# Altium PCB PCB1.PcbDoc (part 2 of 2)
Units mil, origin at the board's own origin, x right, y up, seen from the top; angles counter-clockwise.
Board outline 6000 x 4000 mil, 2 copper layers (Top Layer, Bottom Layer); 87 components, 173 nets, 478 pads, 124 vias.
Unrouted connection lines stored in the file: 148.
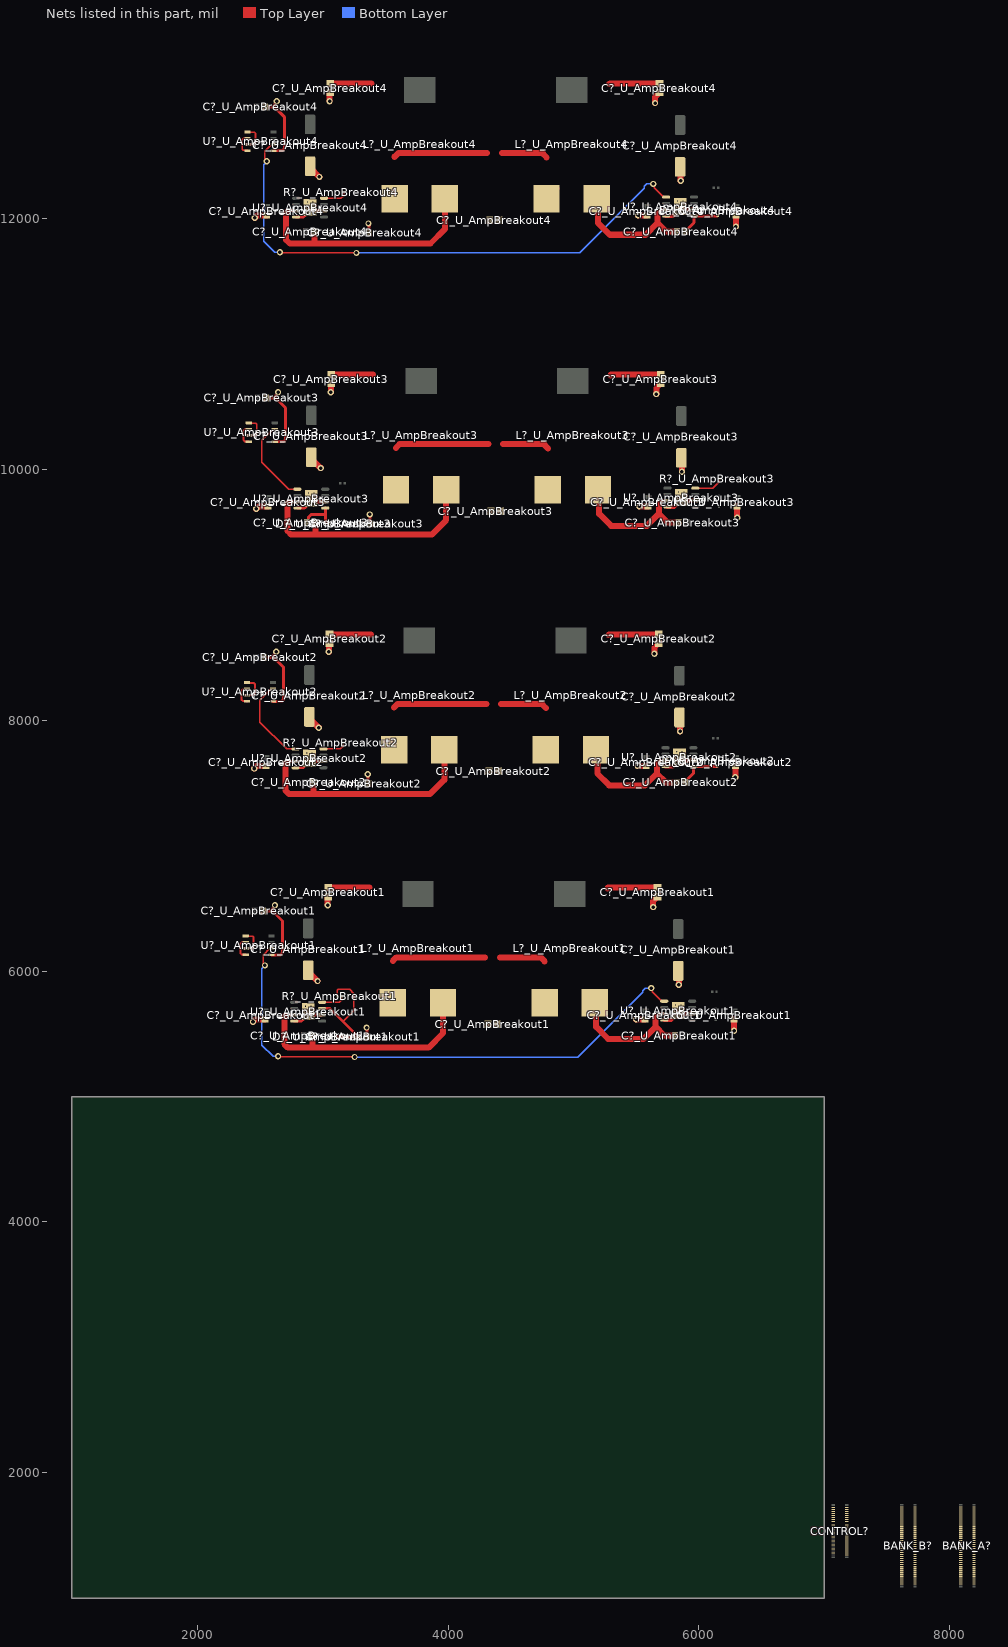
[diagram p2: the nets of this part, all layers, seen from the top]

## Via types
v1: diameter 50, hole 28, Top Layer to Bottom Layer, 76 vias
v2: diameter 19.68, hole 7.87, Top Layer to Bottom Layer, 48 vias

## Nets (pads, with @x,y where several pads share a name; then routed paths per layer and width w, separated by ;. In a path a pad name is that pad's centre, name@x,y a point inside that pad or via, vN(x,y) a via of type N, cw(c..) or ccw(c..) an arc to the next point about the centre after c; other vN are vias at no path point) (continued)
GND: BANK_A?.1 BANK_A?.2 BANK_A?.7 BANK_A?.8 BANK_A?.13 BANK_A?.14 BANK_A?.19 BANK_A?.20 BANK_A?.25 BANK_A?.26 BANK_A?.31 BANK_A?.37 BANK_A?.38 BANK_A?.43 BANK_A?.49 BANK_A?.50 BANK_A?.55 BANK_A?.56 BANK_A?.61 BANK_A?.62 BANK_A?.67 BANK_A?.68 BANK_A?.73 BANK_A?.74 BANK_A?.79 BANK_A?.80 BANK_B?.1 BANK_B?.2 BANK_B?.7 BANK_B?.8 BANK_B?.13 BANK_B?.14 BANK_B?.19 BANK_B?.20 BANK_B?.25 BANK_B?.31 BANK_B?.32 BANK_B?.37 BANK_B?.38 BANK_B?.43 BANK_B?.44 BANK_B?.49 BANK_B?.50 BANK_B?.55 BANK_B?.56 BANK_B?.61 BANK_B?.62 BANK_B?.67 BANK_B?.68 BANK_B?.73 BANK_B?.74 BANK_B?.79 C?_U_AmpBreakout1.1@3045,6594.07 C?_U_AmpBreakout1.2@2525,6480 C?_U_AmpBreakout1.2@2540,5613.07 C?_U_AmpBreakout1.2@2885,6006.14 C?_U_AmpBreakout1.2@3356.93,5475 C?_U_AmpBreakout1.2@5570,5613.07 C?_U_AmpBreakout1.2@5670,6594.07 C?_U_AmpBreakout1.2@5835,6001.14 C?_U_AmpBreakout1.2@6280,5613.07 C?_U_AmpBreakout2.1@3055,8614.07 C?_U_AmpBreakout2.2@2535,8500 C?_U_AmpBreakout2.2@2550,7633.07 C?_U_AmpBreakout2.2@2895,8026.14 C?_U_AmpBreakout2.2@3366.93,7495 C?_U_AmpBreakout2.2@5580,7633.07 C?_U_AmpBreakout2.2@5680,8614.07 C?_U_AmpBreakout2.2@5845,8021.14 C?_U_AmpBreakout2.2@6290,7633.07 C?_U_AmpBreakout3.1@3070,10684.07 C?_U_AmpBreakout3.2@2550,10570 C?_U_AmpBreakout3.2@2565,9703.07 C?_U_AmpBreakout3.2@2910,10096.14 C?_U_AmpBreakout3.2@3381.93,9565 C?_U_AmpBreakout3.2@5595,9703.07 C?_U_AmpBreakout3.2@5695,10684.07 C?_U_AmpBreakout3.2@5860,10091.14 C?_U_AmpBreakout3.2@6305,9703.07 C?_U_AmpBreakout4.1@3060,13004.07 C?_U_AmpBreakout4.2@2540,12890 C?_U_AmpBreakout4.2@2555,12023.07 C?_U_AmpBreakout4.2@2900,12416.14 C?_U_AmpBreakout4.2@3371.93,11885 C?_U_AmpBreakout4.2@5585,12023.07 C?_U_AmpBreakout4.2@5685,13004.07 C?_U_AmpBreakout4.2@5850,12411.14 C?_U_AmpBreakout4.2@6295,12023.07 CONTROL?.17 CONTROL?.18 CONTROL?.19 CONTROL?.20 CONTROL?.21 CONTROL?.22 CONTROL?.23 CONTROL?.24 CONTROL?.25 CONTROL?.27 U?_U_AmpBreakout1.4@2773.78,5601.54 U?_U_AmpBreakout1.4@5723.78,5610 U?_U_AmpBreakout1.5@2593.35,6130 U?_U_AmpBreakout1.6@2996.22,5651.54 U?_U_AmpBreakout1.6@5946.22,5660 U?_U_AmpBreakout1.9 U?_U_AmpBreakout2.4@2783.78,7621.54 U?_U_AmpBreakout2.4@5733.78,7630 U?_U_AmpBreakout2.5@2603.35,8150 U?_U_AmpBreakout2.6@3006.22,7671.54 U?_U_AmpBreakout2.6@5956.22,7680 U?_U_AmpBreakout2.9 U?_U_AmpBreakout3.4@2798.78,9691.54 U?_U_AmpBreakout3.4@5748.78,9700 U?_U_AmpBreakout3.5@2618.35,10220 U?_U_AmpBreakout3.6@3021.22,9741.54 U?_U_AmpBreakout3.6@5971.22,9750 U?_U_AmpBreakout3.9 U?_U_AmpBreakout4.4@2788.78,12011.54 U?_U_AmpBreakout4.4@5738.78,12020 U?_U_AmpBreakout4.5@2608.35,12540 U?_U_AmpBreakout4.6@3011.22,12061.54 U?_U_AmpBreakout4.6@5961.22,12070 U?_U_AmpBreakout4.9 | length 6976.1
  Top Layer w24: C?_U_AmpBreakout1.2@2525,6480 2600,6480 ; C?_U_AmpBreakout2.2@2535,8500 2610,8500 ; C?_U_AmpBreakout4.2@2540,12890 2615,12890 ; C?_U_AmpBreakout3.2@2550,10570 2625,10570 ; U?_U_AmpBreakout1.5@2593.35,6130 2665,6130 2680,6145 2680,6400 2600,6480 ; U?_U_AmpBreakout2.5@2603.35,8150 2675,8150 2690,8165 2690,8420 2610,8500 ; U?_U_AmpBreakout4.5@2608.35,12540 2680,12540 2695,12555 2695,12810 2615,12890 ; U?_U_AmpBreakout3.5@2618.35,10220 2690,10220 2705,10235 2705,10490 2625,10570 ; v1(2620,6525) 2620,6517.96 2600,6497.96 2600,6480 ; v1(2630,8545) 2630,8537.96 2610,8517.96 2610,8500 ; v1(2635,12935) 2635,12927.96 2615,12907.96 2615,12890 ; v1(2645,10615) 2645,10607.96 2625,10587.96 2625,10570 ; U?_U_AmpBreakout1.4@2773.78,5601.54 2831.65,5601.54 2846.61,5616.49 2846.61,5620.62 2859.21,5633.23 v2(2863.35,5633.23) ; U?_U_AmpBreakout2.4@2783.78,7621.54 2841.65,7621.54 2856.61,7636.49 2856.61,7640.62 2869.21,7653.23 v2(2873.35,7653.23) ; U?_U_AmpBreakout4.4@2788.78,12011.54 2846.65,12011.54 2861.61,12026.49 2861.61,12030.62 2874.21,12043.23 v2(2878.35,12043.23) ; U?_U_AmpBreakout3.4@2798.78,9691.54 2856.65,9691.54 2871.61,9706.49 2871.61,9710.62 2884.21,9723.23 v2(2888.35,9723.23) ; U?_U_AmpBreakout1.9@2906.65,5634.8 2923.39,5651.54 U?_U_AmpBreakout1.6@2996.22,5651.54 ; U?_U_AmpBreakout2.9@2916.65,7654.8 2933.39,7671.54 U?_U_AmpBreakout2.6@3006.22,7671.54 ; U?_U_AmpBreakout4.9@2921.65,12044.8 2938.39,12061.54 U?_U_AmpBreakout4.6@3011.22,12061.54 ; U?_U_AmpBreakout3.9@2931.65,9724.8 2948.39,9741.54 U?_U_AmpBreakout3.6@3021.22,9741.54 ; v1(3350,5550) 3353.46,5546.54 3353.46,5478.46 C?_U_AmpBreakout1.2@3356.93,5475 ; v1(3360,7570) 3363.46,7566.54 3363.46,7498.46 C?_U_AmpBreakout2.2@3366.93,7495 ; v1(3365,11960) 3368.46,11956.54 3368.46,11888.46 C?_U_AmpBreakout4.2@3371.93,11885 ; v1(3375,9640) 3378.46,9636.54 3378.46,9568.46 C?_U_AmpBreakout3.2@3381.93,9565
  Top Layer w32: U?_U_AmpBreakout1.4@5723.78,5610 5777.52,5610 5800.61,5633.09 5804.74,5633.09 v2(5813.35,5641.69) ; U?_U_AmpBreakout2.4@5733.78,7630 5787.52,7630 5810.61,7653.09 5814.74,7653.09 v2(5823.35,7661.69) ; U?_U_AmpBreakout4.4@5738.78,12020 5792.52,12020 5815.61,12043.09 5819.74,12043.09 v2(5828.35,12051.69) ; U?_U_AmpBreakout3.4@5748.78,9700 5802.52,9700 5825.61,9723.09 5829.74,9723.09 v2(5838.35,9731.69) ; v2(5856.65,5685) 5856.65,5672.74 5869.39,5660 U?_U_AmpBreakout1.6@5946.22,5660 ; v2(5866.65,7705) 5866.65,7692.74 5879.39,7680 U?_U_AmpBreakout2.6@5956.22,7680 ; v2(5871.65,12095) 5871.65,12082.74 5884.39,12070 U?_U_AmpBreakout4.6@5961.22,12070 ; v2(5881.65,9775) 5881.65,9762.74 5894.39,9750 U?_U_AmpBreakout3.6@5971.22,9750
  Top Layer w48: v1(2445,5595) 2463.07,5613.07 C?_U_AmpBreakout1.2@2540,5613.07 ; v1(2455,7615) 2473.07,7633.07 C?_U_AmpBreakout2.2@2550,7633.07 ; v1(2460,12005) 2478.07,12023.07 C?_U_AmpBreakout4.2@2555,12023.07 ; v1(2470,9685) 2488.07,9703.07 C?_U_AmpBreakout3.2@2565,9703.07 ; C?_U_AmpBreakout1.2@2885,6006.14 2885,5995 2960,5920 v1(2960,5920.51) v1@2957.99,5922.53 ; C?_U_AmpBreakout2.2@2895,8026.14 2895,8015 2970,7940 v1(2970,7940.51) v1@2967.99,7942.53 ; C?_U_AmpBreakout4.2@2900,12416.14 2900,12405 2975,12330 v1(2975,12330.51) v1@2972.99,12332.53 ; C?_U_AmpBreakout3.2@2910,10096.14 2910,10085 2985,10010 v1(2985,10010.51) v1@2982.99,10012.53 ; v1(3040,6525) 3040.38,6525.38 3040.38,6589.45 C?_U_AmpBreakout1.1@3045,6594.07 ; v1(3050,8545) 3050.38,8545.38 3050.38,8609.45 C?_U_AmpBreakout2.1@3055,8614.07 ; v1(3055,12935) 3055.38,12935.38 3055.38,12999.45 C?_U_AmpBreakout4.1@3060,13004.07 ; v1(3065,10615) 3065.38,10615.38 3065.38,10679.45 C?_U_AmpBreakout3.1@3070,10684.07 ; v1(5500,5615) 5500.54,5615 5502.09,5613.45 5569.62,5613.45 C?_U_AmpBreakout1.2@5570,5613.07 ; v1(5510,7635) 5510.54,7635 5512.09,7633.45 5579.62,7633.45 C?_U_AmpBreakout2.2@5580,7633.07 ; v1(5515,12025) 5515.54,12025 5517.09,12023.45 5584.62,12023.45 C?_U_AmpBreakout4.2@5585,12023.07 ; v1(5525,9705) 5525.54,9705 5527.09,9703.45 5594.62,9703.45 C?_U_AmpBreakout3.2@5595,9703.07 ; v1(5635,6510) 5635.38,6510.38 5635.38,6559.45 5663.37,6587.44 5663.37,6588.45 5668.98,6594.07 C?_U_AmpBreakout1.2@5670,6594.07 ; v1(5645,8530) 5645.38,8530.38 5645.38,8579.45 5673.37,8607.44 5673.37,8608.45 5678.98,8614.07 C?_U_AmpBreakout2.2@5680,8614.07 ; v1(5650,12920) 5650.38,12920.38 5650.38,12969.45 5678.37,12997.44 5678.37,12998.45 5683.98,13004.07 C?_U_AmpBreakout4.2@5685,13004.07 ; v1(5660,10600) 5660.38,10600.38 5660.38,10649.45 5688.37,10677.44 5688.37,10678.45 5693.98,10684.07 C?_U_AmpBreakout3.2@5695,10684.07 ; C?_U_AmpBreakout1.2@5835,6001.14 5839.62,5996.52 5839.62,5890.38 v1(5840,5890) ; C?_U_AmpBreakout2.2@5845,8021.14 5849.62,8016.52 5849.62,7910.38 v1(5850,7910) ; C?_U_AmpBreakout4.2@5850,12411.14 5854.62,12406.52 5854.62,12300.38 v1(5855,12300) ; C?_U_AmpBreakout3.2@5860,10091.14 5864.62,10086.52 5864.62,9980.38 v1(5865,9980) ; v1(6280,5525) C?_U_AmpBreakout1.2@6280,5613.07 ; v1(6290,7545) C?_U_AmpBreakout2.2@6290,7633.07 ; v1(6295,11935) C?_U_AmpBreakout4.2@6295,12023.07 ; v1(6305,9615) C?_U_AmpBreakout3.2@6305,9703.07
  other v2: 2906.65,5633.23 5856.65,5641.69 2863.35,5676.54 2906.65,5676.54 5813.35,5685 2863.35,5719.84 2906.65,5719.84 5813.35,5728.31 5856.65,5728.31 2916.65,7653.23 5866.65,7661.69 2873.35,7696.54 2916.65,7696.54 5823.35,7705 2873.35,7739.84 2916.65,7739.84 5823.35,7748.31 5866.65,7748.31 2931.65,9723.23 5881.65,9731.69 2888.35,9766.54 2931.65,9766.54 5838.35,9775 2888.35,9809.84 2931.65,9809.84 5838.35,9818.31 5881.65,9818.31 2921.65,12043.23 5871.65,12051.69 2878.35,12086.54 2921.65,12086.54 5828.35,12095 2878.35,12129.84 2921.65,12129.84 5828.35,12138.31 5871.65,12138.31
IN_U_AmpBreakout1_N: U?_U_AmpBreakout1.2@2386.65,6230 U?_U_AmpBreakout1.4@2386.65,6130 | length 169.6
  Top Layer w15: U?_U_AmpBreakout1.4@2386.65,6130 2383.41,6133.24 2353.79,6133.24 2344.55,6142.48 2344.55,6217.52 2353.79,6226.76 2383.41,6226.76 U?_U_AmpBreakout1.2@2386.65,6230
IN_U_AmpBreakout1_P: U?_U_AmpBreakout1.1@2386.65,6280 U?_U_AmpBreakout1.3@2386.65,6180 | length 214.1
  Top Layer w15: U?_U_AmpBreakout1.3@2386.65,6180 2440,6180 2450,6190 2450,6205 2450,6215 2450,6268.42 2441.21,6277.21 2389.45,6277.21 U?_U_AmpBreakout1.1@2386.65,6280
IN_U_AmpBreakout2_N: U?_U_AmpBreakout2.2@2396.65,8250 U?_U_AmpBreakout2.4@2396.65,8150 | length 169.6
  Top Layer w15: U?_U_AmpBreakout2.4@2396.65,8150 2393.41,8153.24 2363.79,8153.24 2354.55,8162.48 2354.55,8237.52 2363.79,8246.76 2393.41,8246.76 U?_U_AmpBreakout2.2@2396.65,8250
IN_U_AmpBreakout2_P: U?_U_AmpBreakout2.1@2396.65,8300 U?_U_AmpBreakout2.3@2396.65,8200 | length 214.1
  Top Layer w15: U?_U_AmpBreakout2.3@2396.65,8200 2450,8200 2460,8210 2460,8225 2460,8235 2460,8288.42 2451.21,8297.21 2399.45,8297.21 U?_U_AmpBreakout2.1@2396.65,8300
IN_U_AmpBreakout3_N: U?_U_AmpBreakout3.2@2411.65,10320 U?_U_AmpBreakout3.4@2411.65,10220 | length 169.6
  Top Layer w15: U?_U_AmpBreakout3.4@2411.65,10220 2408.41,10223.24 2378.79,10223.24 2369.55,10232.48 2369.55,10307.52 2378.79,10316.76 2408.41,10316.76 U?_U_AmpBreakout3.2@2411.65,10320
IN_U_AmpBreakout3_P: U?_U_AmpBreakout3.1@2411.65,10370 U?_U_AmpBreakout3.3@2411.65,10270 | length 214.1
  Top Layer w15: U?_U_AmpBreakout3.3@2411.65,10270 2465,10270 2475,10280 2475,10295 2475,10305 2475,10358.42 2466.21,10367.21 2414.45,10367.21 U?_U_AmpBreakout3.1@2411.65,10370
IN_U_AmpBreakout4_N: U?_U_AmpBreakout4.2@2401.65,12640 U?_U_AmpBreakout4.4@2401.65,12540 | length 169.6
  Top Layer w15: U?_U_AmpBreakout4.4@2401.65,12540 2398.41,12543.24 2368.79,12543.24 2359.55,12552.48 2359.55,12627.52 2368.79,12636.76 2398.41,12636.76 U?_U_AmpBreakout4.2@2401.65,12640
IN_U_AmpBreakout4_P: U?_U_AmpBreakout4.1@2401.65,12690 U?_U_AmpBreakout4.3@2401.65,12590 | length 214.1
  Top Layer w15: U?_U_AmpBreakout4.3@2401.65,12590 2455,12590 2465,12600 2465,12615 2465,12625 2465,12678.42 2456.21,12687.21 2404.45,12687.21 U?_U_AmpBreakout4.1@2401.65,12690
Net*?_2C: CONTROL?.2 CONTROL?.4 CONTROL?.6 CONTROL?.8 CONTROL?.10 CONTROL?.12 CONTROL?.14 CONTROL?.16
Net*?_3A: BANK_A?.3
Net*?_3B: BANK_B?.3
Net*?_4A: BANK_A?.4
Net*?_4B: BANK_B?.4
Net*?_5A: BANK_A?.5
Net*?_5B: BANK_B?.5
Net*?_6A: BANK_A?.6
Net*?_6B: BANK_B?.6
Net*?_9A: BANK_A?.9
Net*?_9B: BANK_B?.9
Net*?_10A: BANK_A?.10
Net*?_10B: BANK_B?.10
Net*?_11A: BANK_A?.11
Net*?_11B: BANK_B?.11
Net*?_12A: BANK_A?.12
Net*?_12B: BANK_B?.12
Net*?_15A: BANK_A?.15
Net*?_15B: BANK_B?.15
Net*?_16A: BANK_A?.16
Net*?_16B: BANK_B?.16
Net*?_17A: BANK_A?.17
Net*?_17B: BANK_B?.17
Net*?_18A: BANK_A?.18
Net*?_18B: BANK_B?.18
Net*?_21A: BANK_A?.21
Net*?_21B: BANK_B?.21
Net*?_22A: BANK_A?.22
Net*?_22B: BANK_B?.22
Net*?_23A: BANK_A?.23
Net*?_23B: BANK_B?.23
Net*?_24A: BANK_A?.24
Net*?_24B: BANK_B?.24
Net*?_26B: BANK_B?.26
Net*?_26C: CONTROL?.26
Net*?_27A: BANK_A?.27
Net*?_27B: BANK_B?.27
Net*?_28A: BANK_A?.28
Net*?_28B: BANK_B?.28
Net*?_28C: CONTROL?.28
Net*?_29A: BANK_A?.29
Net*?_29B: BANK_B?.29
Net*?_29C: CONTROL?.29
Net*?_30A: BANK_A?.30
Net*?_30B: BANK_B?.30
Net*?_30C: CONTROL?.30
Net*?_31C: CONTROL?.31
Net*?_32A: BANK_A?.32
Net*?_32C: CONTROL?.32
Net*?_33A: BANK_A?.33
Net*?_33B: BANK_B?.33
Net*?_33C: CONTROL?.33
Net*?_34A: BANK_A?.34
Net*?_34B: BANK_B?.34
Net*?_34C: CONTROL?.34
Net*?_35A: BANK_A?.35
Net*?_35B: BANK_B?.35
Net*?_35C: CONTROL?.35
Net*?_36A: BANK_A?.36
Net*?_36B: BANK_B?.36
Net*?_36C: CONTROL?.36
Net*?_37C: CONTROL?.37
Net*?_38C: CONTROL?.38
Net*?_39A: BANK_A?.39
Net*?_39B: BANK_B?.39
Net*?_39C: CONTROL?.39
Net*?_40A: BANK_A?.40
Net*?_40B: BANK_B?.40
Net*?_40C: CONTROL?.40
Net*?_41A: BANK_A?.41
Net*?_41B: BANK_B?.41
Net*?_41C: CONTROL?.41
Net*?_42A: BANK_A?.42
Net*?_42B: BANK_B?.42
Net*?_42C: CONTROL?.42
Net*?_43C: CONTROL?.43
Net*?_44A: BANK_A?.44
Net*?_44C: CONTROL?.44
Net*?_45A: BANK_A?.45
Net*?_45B: BANK_B?.45
Net*?_45C: CONTROL?.45
Net*?_46A: BANK_A?.46
Net*?_46B: BANK_B?.46
Net*?_46C: CONTROL?.46
Net*?_47A: BANK_A?.47
Net*?_47B: BANK_B?.47
Net*?_47C: CONTROL?.47
Net*?_48A: BANK_A?.48
Net*?_48B: BANK_B?.48
Net*?_48C: CONTROL?.48
Net*?_49C: CONTROL?.49
Net*?_50C: CONTROL?.50
Net*?_51A: BANK_A?.51
Net*?_51B: BANK_B?.51
Net*?_52A: BANK_A?.52
Net*?_52B: BANK_B?.52
Net*?_53A: BANK_A?.53
Net*?_53B: BANK_B?.53
Net*?_54A: BANK_A?.54
Net*?_54B: BANK_B?.54
Net*?_57A: BANK_A?.57
Net*?_57B: BANK_B?.57
Net*?_58A: BANK_A?.58
Net*?_58B: BANK_B?.58
Net*?_59A: BANK_A?.59
Net*?_59B: BANK_B?.59
Net*?_60A: BANK_A?.60
Net*?_60B: BANK_B?.60
Net*?_63A: BANK_A?.63
Net*?_63B: BANK_B?.63
Net*?_64A: BANK_A?.64
Net*?_64B: BANK_B?.64
Net*?_65A: BANK_A?.65
Net*?_65B: BANK_B?.65
Net*?_66A: BANK_A?.66
Net*?_66B: BANK_B?.66
Net*?_69A: BANK_A?.69
Net*?_69B: BANK_B?.69
Net*?_70A: BANK_A?.70
Net*?_70B: BANK_B?.70
Net*?_71A: BANK_A?.71
Net*?_71B: BANK_B?.71
Net*?_72A: BANK_A?.72
Net*?_72B: BANK_B?.72
Net*?_75A: BANK_A?.75
Net*?_75B: BANK_B?.75
Net*?_76A: BANK_A?.76
Net*?_76B: BANK_B?.76
Net*?_77A: BANK_A?.77
Net*?_77B: BANK_B?.77
Net*?_78A: BANK_A?.78
Net*?_78B: BANK_B?.78
Net*?_80B: BANK_B?.80
NetC?_U_AmpBreakout1_1: C?_U_AmpBreakout1.1@3290,5475 D?_U_AmpBreakout1.1@3106.54,5475 R?_U_AmpBreakout1.1@3117.28,5800 U?_U_AmpBreakout1.7@2996.22,5701.54 | length 1028.9
  Top Layer w10: R?_U_AmpBreakout1.1@3117.28,5800 3117.28,5847.28 3125,5855 3215,5855 3250,5820 3250,5684.1 3165.45,5599.55 ; C?_U_AmpBreakout1.1@3286.06,5475 C?_U_AmpBreakout1.1@3290,5475
  Top Layer w24: U?_U_AmpBreakout1.7@2996.22,5701.54 3059.53,5701.54 3270.5,5490.56 3278.38,5490.56 3286.06,5482.87 C?_U_AmpBreakout1.1@3286.06,5475 ; D?_U_AmpBreakout1.1@3106.54,5475 C?_U_AmpBreakout1.1@3290,5475
NetC?_U_AmpBreakout2_1: C?_U_AmpBreakout2.1@5888.46,7505 D?_U_AmpBreakout2.2@6145,7633.46 U?_U_AmpBreakout2.5@5956.22,7630 | length 345.7
  Top Layer w10: C?_U_AmpBreakout2.1@5888.46,7505 C?_U_AmpBreakout2.1@5888.46,7508.94 ; D?_U_AmpBreakout2.2@6143.27,7631.73 D?_U_AmpBreakout2.2@6145,7633.46
  Top Layer w24: C?_U_AmpBreakout2.1@5888.46,7508.94 5956.22,7576.69 U?_U_AmpBreakout2.5@5956.22,7630 6141.54,7630 D?_U_AmpBreakout2.2@6145,7633.46
NetC?_U_AmpBreakout3_1: C?_U_AmpBreakout3.1@2876.54,9575 D?_U_AmpBreakout3.2@3048.46,9565 U?_U_AmpBreakout3.5@3021.22,9691.54 | length 330.6
  Top Layer w10: D?_U_AmpBreakout3.2@3045.71,9565 D?_U_AmpBreakout3.2@3048.46,9565
  Top Layer w24: C?_U_AmpBreakout3.1@2876.54,9575 2887.1,9585.56 2887.1,9618.53 2909.08,9640.51 3021.22,9640.51 ; U?_U_AmpBreakout3.5@3021.22,9691.54 3021.22,9640.51 ; D?_U_AmpBreakout3.2@3045.71,9565 3021.22,9589.49 3021.22,9640.51
NetC?_U_AmpBreakout4_1: C?_U_AmpBreakout4.1@5893.46,11895 D?_U_AmpBreakout4.2@6150,12023.46 U?_U_AmpBreakout4.5@5961.22,12020 | length 345.7
  Top Layer w10: C?_U_AmpBreakout4.1@5893.46,11895 C?_U_AmpBreakout4.1@5893.46,11898.94 ; D?_U_AmpBreakout4.2@6148.27,12021.73 D?_U_AmpBreakout4.2@6150,12023.46
  Top Layer w24: C?_U_AmpBreakout4.1@5893.46,11898.94 5961.22,11966.69 U?_U_AmpBreakout4.5@5961.22,12020 6146.54,12020 D?_U_AmpBreakout4.2@6150,12023.46
NetR?_U_AmpBreakout1_2: R?_U_AmpBreakout1.2@3152.72,5800 U?_U_AmpBreakout1.8@2996.22,5751.54 | length 192.6
  Top Layer w10: U?_U_AmpBreakout1.8@2996.22,5751.54 3131.54,5751.54 3152.72,5772.72 R?_U_AmpBreakout1.2@3152.72,5800
NetR?_U_AmpBreakout2_2: R?_U_AmpBreakout2.2@3162.72,7820 U?_U_AmpBreakout2.8@3006.22,7771.54 | length 192.6
  Top Layer w10: U?_U_AmpBreakout2.8@3006.22,7771.54 3141.54,7771.54 3162.72,7792.72 R?_U_AmpBreakout2.2@3162.72,7820
NetR?_U_AmpBreakout3_2: R?_U_AmpBreakout3.2@6165,9925 U?_U_AmpBreakout3.8@5971.22,9850 | length 236.6
  Top Layer w10: U?_U_AmpBreakout3.8@5971.22,9850 6110,9850 6160.16,9900.16 6160.16,9920.16 R?_U_AmpBreakout3.2@6165,9925
NetR?_U_AmpBreakout4_2: R?_U_AmpBreakout4.2@3167.72,12210 U?_U_AmpBreakout4.8@3011.22,12161.54 | length 192.6
  Top Layer w10: U?_U_AmpBreakout4.8@3011.22,12161.54 3146.54,12161.54 3167.72,12182.72 R?_U_AmpBreakout4.2@3167.72,12210
NetU?_U_AmpBreakout1_1: U?_U_AmpBreakout1.1@5723.78,5760 U?_U_AmpBreakout1.6@2593.35,6180 | length 4368.3
  Top Layer w10: v1(2540,6045) 2530.86,6045 2525,6050.86 2525,6125.43 2579.57,6180 U?_U_AmpBreakout1.6@2593.35,6180 ; v1(2645,5320) 2647.5,5317.5 3252.5,5317.5 v1(3255,5315) ; v1(5620,5865) 5627.65,5857.35 5627.65,5836.44 5704.1,5760 U?_U_AmpBreakout1.1@5723.78,5760
  Bottom Layer w10: v1(2540,6045) 2515,6020 2515,5410 2605,5320 v1(2645,5320) ; v1(3255,5315) 5035,5315 5550.86,5830.86 5550.86,5845.03 5570.82,5865 v1(5620,5865)
NetU?_U_AmpBreakout2_1: U?_U_AmpBreakout2.1@2783.78,7771.54 U?_U_AmpBreakout2.7@2603.35,8250 | length 688.1
  Top Layer w10: U?_U_AmpBreakout2.7@2603.35,8250 2589.57,8250 2500,8160.43 2500,7985 2713.46,7771.54 U?_U_AmpBreakout2.1@2783.78,7771.54
NetU?_U_AmpBreakout3_1: U?_U_AmpBreakout3.1@2798.78,9841.54 U?_U_AmpBreakout3.7@2618.35,10320 | length 688.1
  Top Layer w10: U?_U_AmpBreakout3.7@2618.35,10320 2604.57,10320 2515,10230.43 2515,10055 2728.46,9841.54 U?_U_AmpBreakout3.1@2798.78,9841.54
NetU?_U_AmpBreakout4_1: U?_U_AmpBreakout4.1@5738.78,12170 U?_U_AmpBreakout4.6@2608.35,12590 | length 4368.3
  Top Layer w10: v1(2555,12455) 2545.86,12455 2540,12460.86 2540,12535.43 2594.57,12590 U?_U_AmpBreakout4.6@2608.35,12590 ; v1(2660,11730) 2662.5,11727.5 3267.5,11727.5 v1(3270,11725) ; v1(5635,12275) 5642.65,12267.35 5642.65,12246.44 5719.1,12170 U?_U_AmpBreakout4.1@5738.78,12170
  Bottom Layer w10: v1(2555,12455) 2530,12430 2530,11820 2620,11730 v1(2660,11730) ; v1(3270,11725) 5050,11725 5565.86,12240.86 5565.86,12255.03 5585.82,12275 v1(5635,12275)
OUT_U_AmpBreakout1_N: C?_U_AmpBreakout1.1@4392.4,5575 C?_U_AmpBreakout1.1@5670,6665 L?_U_AmpBreakout1.1@4770.2,5745.88 | length 884.3
  Top Layer w48: 4414.16,6110 4742.08,6110 ; 4742.08,6105 4770.2,6076.88 ; L?_U_AmpBreakout1.1@4770.2,5745.88 L?_U_AmpBreakout1.1@4851.2,5826.88 ; 5270,6660 5275,6665 C?_U_AmpBreakout1.1@5670,6665
OUT_U_AmpBreakout1_P: C?_U_AmpBreakout1.2@3045,6665 C?_U_AmpBreakout1.2@4317.6,5575 L?_U_AmpBreakout1.1@3560.2,5745.88 | length 1077.8
  Top Layer w48: C?_U_AmpBreakout1.2@3045,6665 3375,6665 ; L?_U_AmpBreakout1.1@3560,5746.08 L?_U_AmpBreakout1.1@3560.2,5745.88 ; 3560,6081.88 3588.12,6110 4295.84,6110
OUT_U_AmpBreakout2_N: C?_U_AmpBreakout2.1@4402.4,7595 C?_U_AmpBreakout2.1@5680,8685 L?_U_AmpBreakout2.1@4780.2,7765.88 | length 884.3
  Top Layer w48: 4424.16,8130 4752.08,8130 ; 4752.08,8125 4780.2,8096.88 ; L?_U_AmpBreakout2.1@4780.2,7765.88 L?_U_AmpBreakout2.1@4861.2,7846.88 ; 5280,8680 5285,8685 C?_U_AmpBreakout2.1@5680,8685
OUT_U_AmpBreakout2_P: C?_U_AmpBreakout2.2@3055,8685 C?_U_AmpBreakout2.2@4327.6,7595 L?_U_AmpBreakout2.1@3570.2,7765.88 | length 1077.8
  Top Layer w48: C?_U_AmpBreakout2.2@3055,8685 3385,8685 ; L?_U_AmpBreakout2.1@3570,7766.08 L?_U_AmpBreakout2.1@3570.2,7765.88 ; 3570,8101.88 3598.12,8130 4305.84,8130
OUT_U_AmpBreakout3_N: C?_U_AmpBreakout3.1@4417.4,9665 C?_U_AmpBreakout3.1@5695,10755 L?_U_AmpBreakout3.1@4795.2,9835.88 | length 884.3
  Top Layer w48: 4439.16,10200 4767.08,10200 ; 4767.08,10195 4795.2,10166.88 ; L?_U_AmpBreakout3.1@4795.2,9835.88 L?_U_AmpBreakout3.1@4876.2,9916.88 ; 5295,10750 5300,10755 C?_U_AmpBreakout3.1@5695,10755
OUT_U_AmpBreakout3_P: C?_U_AmpBreakout3.2@3070,10755 C?_U_AmpBreakout3.2@4342.6,9665 L?_U_AmpBreakout3.1@3585.2,9835.88 | length 1077.8
  Top Layer w48: C?_U_AmpBreakout3.2@3070,10755 3400,10755 ; L?_U_AmpBreakout3.1@3585,9836.08 L?_U_AmpBreakout3.1@3585.2,9835.88 ; 3585,10171.88 3613.12,10200 4320.84,10200
OUT_U_AmpBreakout4_N: C?_U_AmpBreakout4.1@4407.4,11985 C?_U_AmpBreakout4.1@5685,13075 L?_U_AmpBreakout4.1@4785.2,12155.88 | length 884.3
  Top Layer w48: 4429.16,12520 4757.08,12520 ; 4757.08,12515 4785.2,12486.88 ; L?_U_AmpBreakout4.1@4785.2,12155.88 L?_U_AmpBreakout4.1@4866.2,12236.88 ; 5285,13070 5290,13075 C?_U_AmpBreakout4.1@5685,13075
OUT_U_AmpBreakout4_P: C?_U_AmpBreakout4.2@3060,13075 C?_U_AmpBreakout4.2@4332.6,11985 L?_U_AmpBreakout4.1@3575.2,12155.88 | length 1077.8
  Top Layer w48: C?_U_AmpBreakout4.2@3060,13075 3390,13075 ; L?_U_AmpBreakout4.1@3575,12156.08 L?_U_AmpBreakout4.1@3575.2,12155.88 ; 3575,12491.88 3603.12,12520 4310.84,12520
PRE_OUT_U_AmpBreakout1_N: C?_U_AmpBreakout1.2@5811.54,5485 L?_U_AmpBreakout1.2@5169.8,5745.88 U?_U_AmpBreakout1.3@5723.78,5660 | length 1093.5
  Top Layer w24: 5655,5635 5680,5660 U?_U_AmpBreakout1.3@5723.78,5660
  Top Layer w48: L?_U_AmpBreakout1.2@5169.8,5745.88 5180,5735.69 5180,5555 5275,5460 5560,5460 5655,5555 ; 5655,5635 5655,5555 ; C?_U_AmpBreakout1.2@5811.54,5485 5725,5485 5655,5555
PRE_OUT_U_AmpBreakout1_P: C?_U_AmpBreakout1.2@2918.46,5485 L?_U_AmpBreakout1.2@3959.8,5745.88 U?_U_AmpBreakout1.3@2773.78,5651.54 | length 1962.6
  Top Layer w24: 2705,5645 2711.54,5651.54 U?_U_AmpBreakout1.3@2773.78,5651.54
  Top Layer w48: 2705,5645 2695,5635 2695,5418.12 2723.12,5390 2918.46,5390 ; C?_U_AmpBreakout1.2@2918.46,5485 2918.46,5390 ; L?_U_AmpBreakout1.2@3959.8,5745.88 3959.8,5504.8 3845,5390 2918.46,5390
PRE_OUT_U_AmpBreakout2_N: C?_U_AmpBreakout2.2@5821.54,7505 L?_U_AmpBreakout2.2@5179.8,7765.88 U?_U_AmpBreakout2.3@5733.78,7680 | length 1093.5
  Top Layer w24: 5665,7655 5690,7680 U?_U_AmpBreakout2.3@5733.78,7680
  Top Layer w48: L?_U_AmpBreakout2.2@5179.8,7765.88 5190,7755.69 5190,7575 5285,7480 5570,7480 5665,7575 ; 5665,7655 5665,7575 ; C?_U_AmpBreakout2.2@5821.54,7505 5735,7505 5665,7575
PRE_OUT_U_AmpBreakout2_P: C?_U_AmpBreakout2.2@2928.46,7505 L?_U_AmpBreakout2.2@3969.8,7765.88 U?_U_AmpBreakout2.3@2783.78,7671.54 | length 1962.6
  Top Layer w24: 2715,7665 2721.54,7671.54 U?_U_AmpBreakout2.3@2783.78,7671.54
  Top Layer w48: 2715,7665 2705,7655 2705,7438.12 2733.12,7410 2928.46,7410 ; C?_U_AmpBreakout2.2@2928.46,7505 2928.46,7410 ; L?_U_AmpBreakout2.2@3969.8,7765.88 3969.8,7524.8 3855,7410 2928.46,7410
PRE_OUT_U_AmpBreakout3_N: C?_U_AmpBreakout3.2@5836.54,9575 L?_U_AmpBreakout3.2@5194.8,9835.88 U?_U_AmpBreakout3.3@5748.78,9750 | length 1093.5
  Top Layer w24: 5680,9725 5705,9750 U?_U_AmpBreakout3.3@5748.78,9750
  Top Layer w48: L?_U_AmpBreakout3.2@5194.8,9835.88 5205,9825.69 5205,9645 5300,9550 5585,9550 5680,9645 ; 5680,9725 5680,9645 ; C?_U_AmpBreakout3.2@5836.54,9575 5750,9575 5680,9645
PRE_OUT_U_AmpBreakout3_P: C?_U_AmpBreakout3.2@2943.46,9575 L?_U_AmpBreakout3.2@3984.8,9835.88 U?_U_AmpBreakout3.3@2798.78,9741.54 | length 1962.6
  Top Layer w24: 2730,9735 2736.54,9741.54 U?_U_AmpBreakout3.3@2798.78,9741.54
  Top Layer w48: 2730,9735 2720,9725 2720,9508.12 2748.12,9480 2943.46,9480 ; C?_U_AmpBreakout3.2@2943.46,9575 2943.46,9480 ; L?_U_AmpBreakout3.2@3984.8,9835.88 3984.8,9594.8 3870,9480 2943.46,9480
PRE_OUT_U_AmpBreakout4_N: C?_U_AmpBreakout4.2@5826.54,11895 L?_U_AmpBreakout4.2@5184.8,12155.88 U?_U_AmpBreakout4.3@5738.78,12070 | length 1093.5
  Top Layer w24: 5670,12045 5695,12070 U?_U_AmpBreakout4.3@5738.78,12070
  Top Layer w48: L?_U_AmpBreakout4.2@5184.8,12155.88 5195,12145.69 5195,11965 5290,11870 5575,11870 5670,11965 ; 5670,12045 5670,11965 ; C?_U_AmpBreakout4.2@5826.54,11895 5740,11895 5670,11965
PRE_OUT_U_AmpBreakout4_P: C?_U_AmpBreakout4.2@2933.46,11895 L?_U_AmpBreakout4.2@3974.8,12155.88 U?_U_AmpBreakout4.3@2788.78,12061.54 | length 1962.6
  Top Layer w24: 2720,12055 2726.54,12061.54 U?_U_AmpBreakout4.3@2788.78,12061.54
  Top Layer w48: 2720,12055 2710,12045 2710,11828.12 2738.12,11800 2933.46,11800 ; C?_U_AmpBreakout4.2@2933.46,11895 2933.46,11800 ; L?_U_AmpBreakout4.2@3974.8,12155.88 3974.8,11914.8 3860,11800 2933.46,11800
pads on no net: BANK_A?.S1 BANK_A?.S2 BANK_A?.S3 BANK_A?.S4 BANK_B?.S1 BANK_B?.S2 BANK_B?.S3 BANK_B?.S4 C?_U_AmpBreakout1.1@2851.54,5485 C?_U_AmpBreakout1.1@5878.46,5485 C?_U_AmpBreakout1.1@6280,5680 C?_U_AmpBreakout2.1@2861.54,7505 C?_U_AmpBreakout2.1@3300,7495 C?_U_AmpBreakout2.1@6290,7700 C?_U_AmpBreakout3.1@3315,9565 C?_U_AmpBreakout3.1@5903.46,9575 C?_U_AmpBreakout3.1@6305,9770 C?_U_AmpBreakout4.1@2866.54,11895 C?_U_AmpBreakout4.1@3305,11885 C?_U_AmpBreakout4.1@6295,12090 CONTROL?.5 CONTROL?.M1 CONTROL?.M2 CONTROL?.M3 CONTROL?.M4 D?_U_AmpBreakout1.1@6135,5696.54 D?_U_AmpBreakout1.2 D?_U_AmpBreakout2.1 D?_U_AmpBreakout2.2@3033.46,7495 D?_U_AmpBreakout3.1 D?_U_AmpBreakout3.2@6160,9703.46 D?_U_AmpBreakout4.1 D?_U_AmpBreakout4.2@3038.46,11885 L?_U_AmpBreakout1.3 L?_U_AmpBreakout2.3 L?_U_AmpBreakout3.3 L?_U_AmpBreakout4.3 R?_U_AmpBreakout1.1@6104.57,5835 R?_U_AmpBreakout1.2@6140,5835 R?_U_AmpBreakout2.1 R?_U_AmpBreakout2.2@6150,7855 R?_U_AmpBreakout3.1 R?_U_AmpBreakout3.2@3177.72,9890 R?_U_AmpBreakout4.1 R?_U_AmpBreakout4.2@6155,12245 U?_U_AmpBreakout1.1@2773.78,5751.54 U?_U_AmpBreakout1.5@2996.22,5601.54 U?_U_AmpBreakout1.5@5946.22,5610 U?_U_AmpBreakout1.7@2593.35,6230 U?_U_AmpBreakout1.7@5946.22,5710 U?_U_AmpBreakout1.8@5946.22,5760 U?_U_AmpBreakout2.1@5733.78,7780 U?_U_AmpBreakout2.5@3006.22,7621.54 U?_U_AmpBreakout2.6@2603.35,8200 U?_U_AmpBreakout2.7@3006.22,7721.54 U?_U_AmpBreakout2.7@5956.22,7730 U?_U_AmpBreakout2.8@5956.22,7780 U?_U_AmpBreakout3.1@5748.78,9850 U?_U_AmpBreakout3.5@5971.22,9700 U?_U_AmpBreakout3.6@2618.35,10270 U?_U_AmpBreakout3.7@3021.22,9791.54 U?_U_AmpBreakout3.7@5971.22,9800 U?_U_AmpBreakout3.8@3021.22,9841.54 U?_U_AmpBreakout4.1@2788.78,12161.54 U?_U_AmpBreakout4.5@3011.22,12011.54 U?_U_AmpBreakout4.7 U?_U_AmpBreakout4.8@5961.22,12170
copper on no net: | length 66497.6
  Top Layer w10: v1(2550,8065) 2540.86,8065 2535,8070.86 2535,8145.43 2589.57,8200 2603.35,8200 ; v1(2565,10135) 2555.86,10135 2550,10140.86 2550,10215.43 2604.57,10270 2618.35,10270 ; 2593.35,6230 2579.57,6230 2490,6140.43 2490,5965 2703.46,5751.54 2773.78,5751.54 ; 2608.35,12640 2594.57,12640 2505,12550.43 2505,12375 2718.46,12161.54 2788.78,12161.54 ; v1(2655,7340) 2657.5,7337.5 3262.5,7337.5 v1(3265,7335) ; v1(2670,9410) 2672.5,9407.5 3277.5,9407.5 v1(3280,9405) ; 3020.71,5475 3023.46,5475 ; 3021.22,9841.54 3156.54,9841.54 3177.72,9862.72 3177.72,9890 ; 3030.71,7495 3033.46,7495 ; 3035.71,11885 3038.46,11885 ; 3127.28,7820 3127.28,7867.28 3135,7875 3225,7875 3260,7840 3260,7704.1 3175.45,7619.55 ; 3132.28,12210 3132.28,12257.28 3140,12265 3230,12265 3265,12230 3265,12094.1 3180.45,12009.55 ; 3142.28,9890 3142.28,9937.28 3150,9945 3240,9945 3275,9910 3275,9774.1 3190.45,9689.55 ; 3296.06,7495 3300,7495 ; 3301.06,11885 3305,11885 ; 3311.06,9565 3315,9565 ; v1(5630,7885) 5637.65,7877.35 5637.65,7856.44 5714.1,7780 5733.78,7780 ; v1(5645,9955) 5652.65,9947.35 5652.65,9926.44 5729.1,9850 5748.78,9850 ; 5878.46,5485 5878.46,5488.94 ; 5903.46,9575 5903.46,9578.94 ; 5946.22,5760 6085,5760 6135.16,5810.16 6135.16,5830.16 6140,5835 ; 5956.22,7780 6095,7780 6145.16,7830.16 6145.16,7850.16 6150,7855 ; 5961.22,12170 6100,12170 6150.16,12220.16 6150.16,12240.16 6155,12245 ; v1(6045,5850) 6055.82,5850 6070.82,5835 6104.57,5835 ; v1(6055,7870) 6065.82,7870 6080.82,7855 6114.57,7855 ; v1(6060,12260) 6070.82,12260 6085.82,12245 6119.57,12245 ; v1(6070,9940) 6080.82,9940 6095.82,9925 6129.57,9925 ; 6121.54,5710 6128.39,5703.15 6131.14,5703.15 6135,5699.29 ; 6131.54,7730 6138.39,7723.15 6141.14,7723.15 6145,7719.29 ; 6133.27,5611.73 6135,5613.46 ; 6135,5696.54 6135,5693.86 6138.86,5690 ; 6136.54,12120 6143.39,12113.15 6146.14,12113.15 6150,12109.29 ; 6145,7716.54 6145,7713.86 6148.86,7710 ; 6146.54,9800 6153.39,9793.15 6156.14,9793.15 6160,9789.29 ; 6150,12106.54 6150,12103.86 6153.86,12100 ; 6158.27,9701.73 6160,9703.46 ; 6160,9786.54 6160,9783.86 6163.86,9780 ; 6270,5690 6280,5680 ; 6280,7710 6290,7700 ; 6285,12100 6295,12090 ; 6295,9780 6305,9770 ; 2195,5185 2195,6935 6445,6935 6445,5185 2195,5185 ; 2205,7205 2205,8955 6455,8955 6455,7205 2205,7205 ; 2210,11595 2210,13345 6460,13345 6460,11595 2210,11595 ; 2220,9275 2220,11025 6470,11025 6470,9275 2220,9275
  Top Layer w24: 2851.54,5485 2862.1,5495.56 2862.1,5528.53 2884.08,5550.51 2996.22,5550.51 ; 2861.54,7505 2872.1,7515.56 2872.1,7548.53 2894.08,7570.51 3006.22,7570.51 ; 2866.54,11895 2877.1,11905.56 2877.1,11938.53 2899.08,11960.51 3011.22,11960.51 ; 2996.22,5601.54 2996.22,5550.51 ; 3006.22,7621.54 3006.22,7570.51 ; 3006.22,7721.54 3069.53,7721.54 3280.5,7510.56 3288.38,7510.56 3296.06,7502.87 3296.06,7495 ; 3011.22,12011.54 3011.22,11960.51 ; 3011.22,12111.54 3074.53,12111.54 3285.5,11900.56 3293.38,11900.56 3301.06,11892.87 3301.06,11885 ; 3020.71,5475 2996.22,5499.49 2996.22,5550.51 ; 3021.22,9791.54 3084.53,9791.54 3295.5,9580.56 3303.38,9580.56 3311.06,9572.87 3311.06,9565 ; 3030.71,7495 3006.22,7519.49 3006.22,7570.51 ; 3035.71,11885 3011.22,11909.49 3011.22,11960.51 ; 3116.54,7495 3300,7495 ; 3121.54,11885 3305,11885 ; 3131.54,9565 3315,9565 ; 5878.46,5488.94 5946.22,5556.69 5946.22,5610 6131.54,5610 6135,5613.46 ; 5903.46,9578.94 5971.22,9646.69 5971.22,9700 6156.54,9700 6160,9703.46 ; 5946.22,5710 6121.54,5710 6135,5696.54 ; 5956.22,7730 6131.54,7730 6145,7716.54 ; 5961.22,12120 6136.54,12120 6150,12106.54 ; 5971.22,9800 6146.54,9800 6160,9786.54 ; 6138.86,5690 v1(6205,5690) 6270,5690 ; 6148.86,7710 v1(6215,7710) 6280,7710 ; 6153.86,12100 v1(6220,12100) 6285,12100 ; 6163.86,9780 v1(6230,9780) 6295,9780
  Bottom Layer w10: v1(2550,8065) 2525,8040 2525,7430 2615,7340 v1(2655,7340) ; v1(2565,10135) 2540,10110 2540,9500 2630,9410 v1(2670,9410) ; v1(3265,7335) 5045,7335 5560.86,7850.86 5560.86,7865.03 5580.82,7885 v1(5630,7885) ; v1(3280,9405) 5060,9405 5575.86,9920.86 5575.86,9935.03 5595.82,9955 v1(5645,9955) ; v1(6045,5850) 6080,5850 6205,5725 v1(6205,5690) ; v1(6055,7870) 6090,7870 6215,7745 v1(6215,7710) ; v1(6060,12260) 6095,12260 6220,12135 v1(6220,12100) ; v1(6070,9940) 6105,9940 6230,9815 v1(6230,9780)

## Polygon pours and split planes (outlines as drawn)
OUT_U_AmpBreakout1_P on Top Layer "OUT_U_AMPBREAKOUT1_P_L01_P001" (solid, pour order 1): 3320,5185 3320,6935 4345,6935 4345,5185
OUT_U_AmpBreakout1_N on Top Layer "OUT_U_AMPBREAKOUT1_N_L01_P002" (solid, remove dead copper, pour order 2): 4365,5185 4365,6935 5340,6935 5340,5185
OUT_U_AmpBreakout4_N on Top Layer "OUT_U_AMPBREAKOUT4_N_L01_P002" (solid, remove dead copper, pour order 2): 4380,11595 4380,13345 5355,13345 5355,11595
OUT_U_AmpBreakout3_P on Top Layer "OUT_U_AMPBREAKOUT3_P_L01_P001" (solid, pour order 1): 3345,9275 3345,11025 4370,11025 4370,9275
OUT_U_AmpBreakout4_P on Top Layer "OUT_U_AMPBREAKOUT4_P_L01_P001" (solid, pour order 1): 3335,11595 3335,13345 4360,13345 4360,11595
OUT_U_AmpBreakout2_P on Top Layer "OUT_U_AMPBREAKOUT2_P_L01_P001" (solid, pour order 1): 3330,7205 3330,8955 4355,8955 4355,7205
OUT_U_AmpBreakout3_N on Top Layer "OUT_U_AMPBREAKOUT3_N_L01_P002" (solid, remove dead copper, pour order 2): 4390,9275 4390,11025 5365,11025 5365,9275
OUT_U_AmpBreakout2_N on Top Layer "OUT_U_AMPBREAKOUT2_N_L01_P002" (solid, remove dead copper, pour order 2): 4375,7205 4375,8955 5350,8955 5350,7205
GND on Bottom Layer "GND_L02_P000" (solid, remove dead copper, pour order 0): 2195,6935 6445,6935 6445,5195 6435,5185 2195,5185
GND on Bottom Layer "GND_L02_P000" (solid, remove dead copper, pour order 0): 2220,11025 6470,11025 6470,9285 6460,9275 2220,9275
GND on Bottom Layer "GND_L02_P000" (solid, remove dead copper, pour order 0): 2205,8955 6455,8955 6455,7215 6445,7205 2205,7205
GND on Bottom Layer "GND_L02_P000" (solid, remove dead copper, pour order 0): 2210,13345 6460,13345 6460,11605 6450,11595 2210,11595

## Text inside footprints (layer, text, board x,y; h text height)
BANK_A?: Mechanical 13 "Metal Mask Thickness: 120um" at 8289.61,1065.28 h16 r90
BANK_B?: Mechanical 13 "Metal Mask Thickness: 120um" at 7819.61,1065.28 h16 r90